# Altium PCB PCB1 V1.PcbDoc (part 2 of 2)
Units mil, origin at the board's own origin, x right, y up, seen from the top; angles counter-clockwise.
Board outline 4993 x 2044 mil, 4 copper layers (Top Layer, GND, VDD, Bottom Layer), stack 62.449 mil thick; 133 components, 91 nets, 461 pads, 189 vias.
Unrouted connection lines stored in the file: 19.
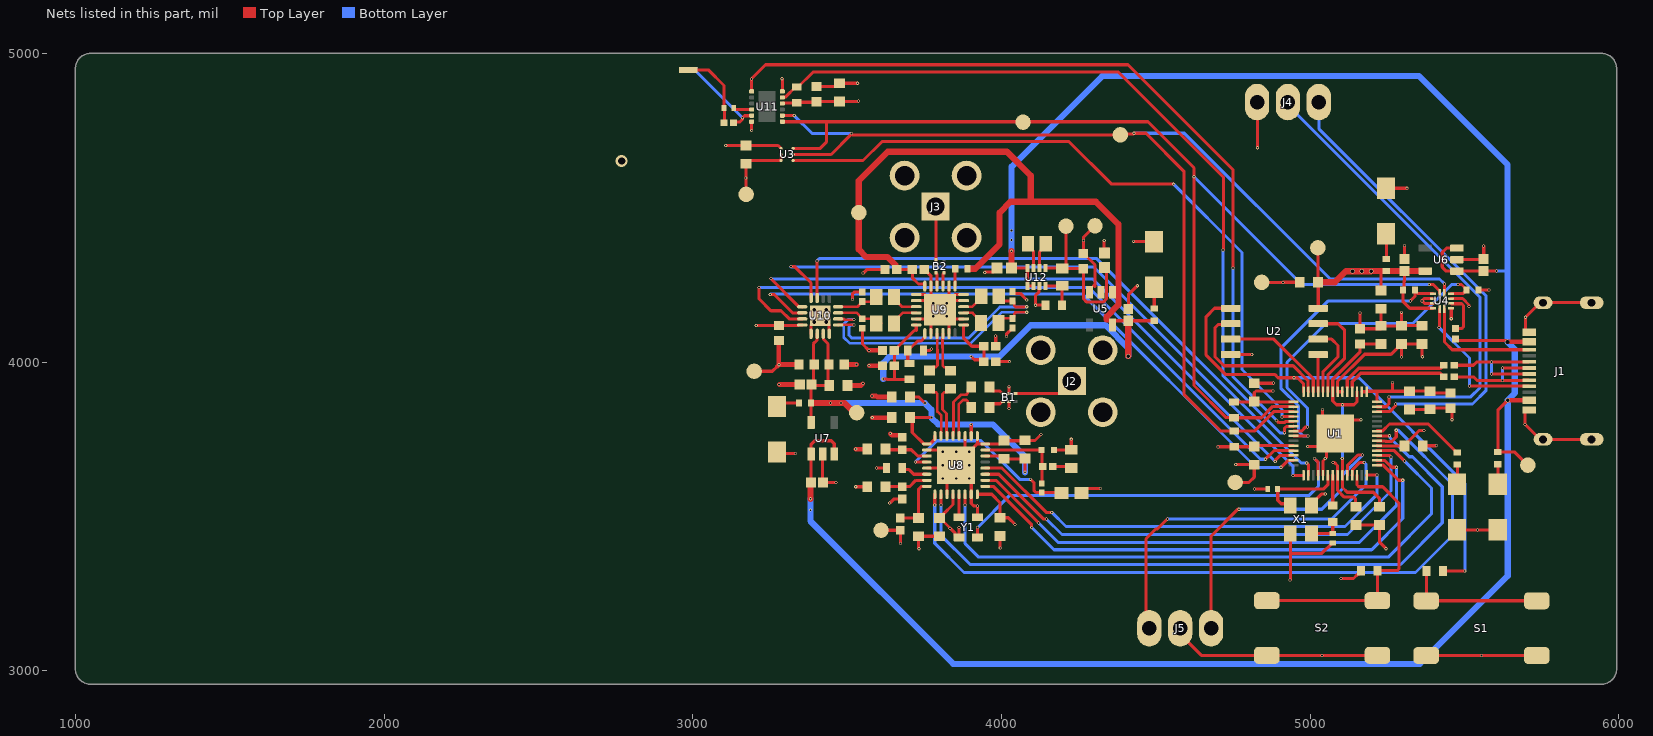
[diagram p4: the nets of this part, all layers, seen from the top]

## Via types
v1: diameter 10, hole 6, Top Layer to Bottom Layer, 164 vias
v2: diameter 19.68, hole 7.87, Top Layer to Bottom Layer, 13 vias
v3: diameter 15, hole 12, Top Layer to Bottom Layer, 6 vias
v4: diameter 19.68, hole 11.81, Top Layer to Bottom Layer, 5 vias
v5: diameter 39.37, hole 23.62, Top Layer to Bottom Layer, 1 vias

## Nets (pads, with @x,y where several pads share a name; then routed paths per layer and width w, separated by ;. In a path a pad name is that pad's centre, name@x,y a point inside that pad or via, vN(x,y) a via of type N, cw(c..) or ccw(c..) an arc to the next point about the centre after c; other vN are vias at no path point)
+3V3: C1.1 C2.1 C3.1 C4.1 C5.1 C6.1 C7.1 C8.1 C9.1 C13.1 C21.1 C28.1 C29.1 C44.1 C46.1 C53.1 C61.1 C62.1 R8.2 R9.2 R10.2 R11.2 R13.2 R17.2 R21.2 TP7.1 U1.1 U1.10 U1.22 U1.33 U1.42 U1.43 U1.44 U1.48 U1.49 U2.8 U3.A1 U4.12 U6.5 U8.28 U8.32 U10.16 U11.10 U11.12 Y1.4 | length 3728.3
  Top Layer w10: v1(3107,4701) 3107.16,4701.16 C61.1@3172,4701.16 3276.75,4701.16 3285.9,4692 U3.A1@3286,4692 ; v1@3205,4118 v1(3205.68,4118.68) C53.1@3279,4118.68 3342.1,4118.68 3343.36,4119.94 U10.16@3354.86,4119.94 ; v1(3289,4917.58) 3290.21,4916.36 U11.12@3290.21,4876.74 ; U11.10@3290.21,4837.37 3291.59,4837.37 3293.63,4839.41 R21.2@3337,4839.41 3338.95,4841.36 3399.05,4841.36 C44.1@3401,4843.32 3475.32,4843.32 C46.1@3476,4844 3536,4844 v1(3537,4845) ; C28.1@3799,3494.53 3808,3485.53 3808,3485 3810.5,3485 3850.23,3445.27 3850.23,3439.83 3858.02,3432.04 Y1.4@3862.94,3432.04 3862.94,3463.94 v1(3863,3464) ; C28.1@3800.97,3494.53 3811.72,3505.28 3811.72,3507.24 3843.16,3538.69 U8.28@3843.16,3571.51 ; U8.32@3921.9,3571.51 3968.49,3571.51 3995,3545 C29.1@3995,3495.53 4022.47,3495.53 v1(4044,3474) ; v1(4701,3725) 4701.41,3725.41 R8.2@4754,3725.41 4817.72,3725.41 C3.1@4818.95,3726.64 4821.28,3728.97 U1.10@4945.72,3728.97 ; R9.2@4753,3870.59 4817.43,3870.59 C2.1@4818.95,3872.11 ; R8.2@4756,3726 R8.2@4756.64,3726.64 ; C2.1@4835.11,3870.7 U1.1@4945.72,3870.7 ; C2.1@4835.11,3872.11 C2.1@4818.95,3872.11 ; v1(4880,3906) 4824.81,3906 4818.95,3900.14 C2.1@4818.95,3872.11 ; TP7.1@5012,4382 TP7.1@5024,4370 ; C13.1@5025,4258.43 C13.1@5025.13,4258.3 5026.11,4257.31 U2.8@5026.11,4174.05 ; C13.1@5025,4266.02 TP7.1@5025,4370 ; v1(5074,3674) 5079.46,3674 5088.83,3664.64 5088.83,3584.17 5110.79,3562.21 5140.79,3562.21 5147.17,3555.83 5147.17,3532.91 C4.1@5149.14,3530.94 ; v1(5100,3299) 5140.36,3299 5154.37,3313.01 5157.39,3313.01 5165.36,3320.98 R10.2@5165.36,3324 ; U1.48@5104.57,3903.57 U1.49@5088.83,3903.57 5088.83,3937.49 5176.45,4025.11 5262.48,4025.11 5283.24,4045.87 5283.24,4047.83 5293.98,4058.58 C7.1@5295.95,4058.58 ; U1.44@5167.57,3903.57 U1.43@5183.31,3903.57 5183.31,3904.28 5184.38,3905.35 5214.95,3905.35 5216.19,3904.11 ; U1.33@5216.19,3728.97 5217.16,3728 C5.1@5305.47,3728 5305.47,3729.97 5353.5,3778 v1(5369,3778) ; U1.42@5216.19,3870.7 5216.19,3904.11 ; C62.1@5216.24,4242.39 5226.98,4231.64 C62.1@5228.95,4231.64 ; 5222.48,4294.43 5228.95,4287.95 C62.1@5228.95,4231.64 ; C62.1@5230.43,4233.11 C62.1@5228.95,4231.64 ; v1(5267,3934) 5267,3907.72 5269.38,3905.35 ; v1(5296,4016) v1(5296,4016) C7.1@5295.95,4058.58 ; C21.1@5305.95,4294.86 5305.95,4262.16 5303.71,4259.92 5303.71,4236.56 R11.2@5300.27,4233.11 5300.27,4196.73 5322.92,4174.08 U4.12@5397.55,4174.08 ; C6.1@5320.54,3906.13 C6.1@5321.04,3905.64 ; v1(5364,4017) 5362.95,4018.05 C8.1@5362.95,4058.58 C7.1@5295.95,4058.58 ; C9.1@5454.95,3899.8 5393.8,3899.8 C1.1@5387.95,3905.64 C6.1@5321.04,3905.64 ; R13.2@5545.32,4233.11 v1(5578.89,4233.11) v1@5579,4233 ; 5216.19,3904.11 5217.43,3905.35 5269.38,3905.35 ; 5269.38,3905.35 C6.1@5321.33,3905.35 C6.1@5321.04,3905.64
  Top Layer w20: C13.1@5025,4258.43 C13.1@5025,4260.14 ; C13.1@5025.13,4258.3 5080.3,4258.3 5116,4294 v3(5137,4294) 5197.57,4294 v3(5198,4294.43) 5222.48,4294.43 R17.2@5246.95,4294.43 5248.61,4294.43 5249.04,4294.86 C21.1@5305.95,4294.86 ; C21.1@5305.68,4294.58 5372.68,4294.58 U6.5@5372.95,4294.31
  other v1: 3833.13,3460.94
  other v3: 5167,4294.43
+3V3A: C23.1 C30.1 C31.1 C32.1 C33.1 C51.1 C52.1 C54.1 R16.2 TP8.1 U7.5 U8.6 U8.10 U8.16 U8.17 U10.2 U10.3 | length 1945.1
  Top Layer w10: C23.1@3383.39,3924 R16.2@3383.39,3867.3 3383.49,3867.19 3383.49,3804.29 U7.5@3383.6,3804.18 ; C54.1@3390.68,3992 3390.68,3932.43 C23.1@3385.25,3927 3388.25,3924 C52.1@3441.94,3924 3438.32,3927.63 C51.1@3438.32,3992 ; C54.1@3393.68,3992 3390.68,3995 3390.68,4058.99 3402.89,4071.19 3402.89,4091.21 U10.2@3403.09,4091.4 ; U10.3@3422.77,4091.4 3422.97,4091.21 3422.97,4074.33 3438.32,4058.99 3438.32,3995 C51.1@3441.32,3992 ; C31.1@3703.53,3886.59 3732.41,3886.59 v1(3752,3867) ; v1(3773,3820) 3772.59,3819.59 C32.1@3703.53,3819.59 3711,3812.12 3711,3771.74 3747.84,3734.9 U8.17@3758.51,3734.9 3769.18,3734.9 3784.1,3749.82 U8.16@3784.1,3760.49 ; v1(3902,3798) 3902.21,3797.79 U8.10@3902.21,3760.49 ; U8.6@3947.49,3695.53 3994.42,3695.53 4004,3685.94 C30.1@4003.58,3685.53 ; C30.1@4004.53,3686.47 C33.1@4071,3686.47 ; v1(4076,3643) C33.1@4076,3687.47
  Top Layer w20: R16.2@3383.39,3867.3 v1(3446.57,3867.3) v1(3480.7,3867.3) 3491.58,3867.3 3522.88,3836 TP8.1@3531,3836
  Bottom Layer w20: v1@3448.87,3867 v1(3752,3867) 3773,3846 v1(3773,3820) 3795,3798 v1(3902,3798) 3972,3798 4076,3694 v1(4076,3643)
+5: C17.1 C55.2 C56.2 C57.2 C58.2 C59.2 C60.2 R15.2 R22.2 R23.2 TP6.1 U5.5 U9.6 U9.13 U9.24 | length 3968.7
  Top Layer w10: v1(3617,3945) 3628.86,3945 ; 3628.86,3944 3653,3944 ; C60.2@3661,4300 C59.2@3711.42,4300 3711.42,4272.58 3731.55,4252.45 3751.55,4252.45 3751.63,4252.37 U9.24@3751.63,4246 ; R23.2@3702,3944 3653,3944 ; U9.6@3715,4119.94 3715.08,4120.02 U9.6@3724.07,4120.02 3724.07,4102.28 ; 3718.07,4101.87 3653.79,4037.59 C55.2@3653,4037.59 C56.2@3653,3987.59 3653,3944 ; U9.13@3890.29,4119.94 3890.21,4120.02 U9.13@3877.61,4120.02 3877.61,4077.39 3904,4051 C57.2@3943,4051 3942.85,4050.85 3942.85,4001.15 C58.2@3942.71,4001 3936.46,4007.25 3912.75,4007.25 v1(3902,4018) ; 4340.4,4137.85 4344.5,4133.75 C17.1@4411,4133.75 4411.12,4133.63 R15.2@4495,4133.63
  Top Layer w20: C60.2@3661,4300 3660.21,4300 3656.04,4304.17 3656.04,4315.31 3631.34,4340.01 3562.7,4340.01 3538,4364.72 TP6.1@3538,4484 3538,4587 3632,4681 4018,4681 4095,4604 4095,4519 ; R22.2@3889.68,4302 3915,4302 3994,4381 3994,4484 4029,4519 4095,4519 ; 4340.4,4137.85 4340.4,4146.71 4379,4185.31 4379,4446 4306,4519 4095,4519 ; v3(4411,4019) C17.1@4411,4133.75
  Bottom Layer w20: v1(3617,3945) 3617,3996.28 3638.72,4018 v1(3902,4018) 3994,4018 4095,4119 4337.13,4119 4411,4045.13 v3(4411,4019)
cpout: C34.1 C35.1 R18.1 U8.7 | length 304.3
  Top Layer w10: U8.7@3958.16,3715.21 U8.7@3947.49,3715.21 3947.57,3715.13 4130.18,3715.13 C35.1@4130.31,3715 4131.72,3713.59 4131.72,3662.41 C34.1@4133.13,3661 4131.56,3659.44 4131.56,3608.33 R18.1@4130,3606.76
flash_cs: R7.1 U1.56 U2.1 | length 1644.8
  Top Layer w10: U2.1@4742.25,4174.05 4689.89,4174.05 4662.95,4147.11 4662.95,4022.05 4724.89,3960.11 4884.89,3960.11 4896,3949 4959.06,3949 4978.59,3929.47 U1.56@4978.59,3903.57 ; R7.1@5429.64,3323 v1(5501,3323)
  Bottom Layer w10: v1(4948,3949) 5158,3949 5501,3606 v1(5501,3323)
GND: B1.2 B1.5 C1.2 C2.2 C3.2 C4.2 C5.2 C6.2 C7.2 C8.2 C9.2 C10.2 C11.2 C12.2 C13.2 C14.2 C15.2 C16.2 C17.2 C18.2 C19.2 C20.2 C21.2 C22.2 C23.2 C28.2 C29.2 C30.2 C31.2 C32.2 C33.2 C35.2 C36.2 C37.2 C38.1 C39.2 C40.1 C41.2 C42.1 C44.2 C46.2 C47.1 C48.1 C49.1 C50.1 C51.2 C52.2 C53.2 C54.2 C55.1 C56.1 C57.1 C58.1 C59.1 C60.1 C61.2 C62.2 D1.1 D2.1 D3.1 D4.1 D5.1 J1.A1_B12 J1.B1_A12 J1.SH1 J1.SH2 J1.SH3 J1.SH4 J2.2 J2.3 J2.4 J2.5 J3.2 J3.3 J3.4 J3.5 J4.1 J5.2 R2.2 R19.1 R20.1 R24.1 S1.1 S1.2 S2.1 S2.2 TP2.1 TP9.1 TP10.1 TP11.1 TP12.1 TP13.1 U1.19 U1.57 U2.4 U3.B1 U3.C1 U4.3 U4.5 U4.10 U4.11 U5.2 U6.2 U7.2 U8.8 U8.9 U8.11 U8.18 U8.21 U8.27 U8.31 U8.33 U9.1 U9.2 U9.5 U9.8 U9.11 U9.14 U9.17 U9.18 U9.20 U9.23 U9.25 U10.1 U10.4 U10.17 U11.6 U12.7 X1.2 X1.4 Y1.2 | length 8607.7
  Top Layer w10: v1@3172,4595 C61.2@3172,4642.1 3182.53,4652.63 U3.C1@3286,4652.63 U3.B1@3286,4672.31 ; v1(3172,4596) 3173,4595 TP12.1@3173,4543 ; v1(3191,4750) U11.6@3191,4778.31 ; TP9.1@3199,3970 3258,3970 3274.5,3986.5 ; D4.1@3273,3708.18 3277.18,3704 v1(3333,3704) ; U10.1@3383.4,4091.4 3383.6,4091.6 3383.6,4120.14 v4(3393.24,4129.79) ; C44.2@3401,4892.68 3465.63,4892.68 C46.2@3476,4903.06 3533.94,4903.06 v1@3535,4902 ; U7.2@3421,3701.82 3421,3611 C22.2@3422,3610 v1@3464,3610 ; v4(3432.61,4129.79) 3441.39,4121.01 3441.39,4103.96 3442.46,4102.9 U10.4@3442.46,4080.46 ; v1(3517,4202) 3517,4220.5 3522.86,4226.35 C47.1@3549,4226.35 ; v1(3528,3596) C41.2@3565.47,3596 ; C48.1@3550,4109.65 3550,4058.18 v1(3570.59,4037.59) ; v1(3552,4288) 3563.35,4299.35 C60.1@3612,4299.35 ; v1(3595,3657) R19.1@3627.41,3657 ; TP10.1@3610,3455 TP10.1@3610,3455 3671.96,3454.96 C40.1@3672,3454.92 3673,3453.92 v1(3673,3412) ; v1(3638,3543) 3650.92,3555.92 C42.1@3679,3555.92 ; U9.5@3724.07,4139.7 3771.32,4139.7 U9.8@3771.32,4092.46 ; U9.2@3724.07,4198.76 U9.25@3771.32,4198.76 ; U9.1@3724.07,4218.44 U9.1@3724.07,4218.44 3751.71,4218.36 U9.25@3771.32,4198.76 ; v1(3733,3395) 3732,3396 C39.2@3732,3435.94 3732.47,3435.47 C28.2@3799,3435.47 ; R24.1@3747.59,4037.59 3768.59,4037.59 v1(3773,4042) ; C59.1@3750,4300 3750.79,4300 3771.32,4279.47 U9.23@3771.32,4246 U9.25@3771.32,4198.76 ; U8.21@3758.51,3656.16 3799.85,3656.16 v2(3809.69,3666) ; U8.18@3758.51,3715.21 3803.79,3715.21 v2(3809.69,3709.31) ; U9.25@3800.84,4169.23 3849.98,4218.36 3877.54,4218.36 U9.18@3877.61,4218.44 ; U8.27@3823.47,3571.51 3823.47,3636.47 v2(3853,3666) 3882.53,3695.53 U8.11@3882.53,3760.49 ; U9.11@3830.37,4092.46 3830.37,4139.7 U9.14@3877.61,4139.7 ; U9.20@3830.37,4246 3830.37,4198.76 U9.17@3877.61,4198.76 ; v2(3896.31,3622.69) 3902.21,3616.79 U8.31@3902.21,3571.51 3902.21,3541.79 3910,3534 v1(3923,3534) 3922,3533 Y1.2@3922,3497 ; v2(3896.31,3709.31) 3921.9,3734.9 ; U8.9@3921.9,3760.49 3921.9,3734.9 ; v1(3946,4290) 3947.16,4291.16 3972.54,4291.16 C16.2@3985.36,4304 ; v1(3981,4084) 3981.58,4083.42 C57.1@3981.58,4051 ; C58.1@3981.29,4001 v1(4026,4001) ; C29.2@3995,3436.47 3995,3400 v1@3997,3398 ; v1(4016,4083) 4016,4089.86 4036,4109.86 C50.1@4036,4110.65 ; B1.5@4024.68,3872.41 v1(4024.68,3849.32) v1@4025,3849 ; B1.2@4024.68,3898 v1(4024.68,3919.68) v1@4025,3920 ; C49.1@4036,4228.35 4036,4227.57 4041.24,4222.33 4060.67,4222.33 v1@4079,4204 ; v1(4110.88,4183.83) 4110.88,4215.34 4110.14,4216.08 4122.07,4228.01 4122.07,4244.83 U12.7@4123.37,4246.13 ; v1@4111.09,4183.41 4111.68,4184 R2.2@4143.36,4184 ; v1(4128,3765) 4108.53,3745.53 4071,3745.53 4070.47,3745 4004,3745 3993.9,3734.9 U8.8@3947.49,3734.9 3921.9,3734.9 ; C35.2@4169.69,3715 4224.94,3715 R20.1@4226,3716.06 v1(4226,3750) ; C36.2@4259.55,3576 4273.55,3590 v1@4320,3590 ; C19.2@4265,4351.68 4266,4352.68 v1@4266,4392 ; v1(4266,4394) 4266,4404 TP11.1@4303,4441 ; C19.2@4266.06,4351.68 4303,4314.75 4303,4244.15 4299.16,4247.99 ; v1@4332.15,4391.14 4332.15,4365.46 4346.82,4365.46 C18.2@4334,4352.64 ; C17.2@4411,4172.25 4411,4218 v1(4440.12,4247.12) ; v1(4428,4391) 4429.18,4389.82 D3.1@4494,4389.82 ; J5.2@4579,3138 4579,3118.32 4647.48,3049.83 S2.2@4859.73,3049.83 v1(5038.87,3049.83) S2.1@5218,3049.83 ; U2.4@4742.25,4024.05 v1(4811,4024) v1(4811,4024) ; TP2.1@4757,3610 4802,3610 4818.95,3626.95 C3.2@4818.95,3667.58 4759.42,3667.58 v1(4759,3668) ; C2.2@4818.95,3931.17 4880.17,3931.17 v1(4881,3932) ; v1(4820,3589) 4820.11,3589.11 C14.2@4862.46,3589.11 ; J4.1@4828,4842 4830,4840 v1(4830,4694) ; TP13.1@4843,4258 v1(4912,4258) 4912.3,4258.3 C13.2@4966.07,4258.3 ; v1(4935,3294) 4935.87,3294.87 4935.87,3380 ; X1.2@4935.87,3444.87 4935.87,3380 ; v1(4992,3726) 5038.61,3726 U1.57@5057.61,3744.99 ; X1.4@5004.77,3535.43 5004.77,3540.35 5036.43,3572 v1(5049,3572) ; v1(5040,3846) 5040,3809.29 U1.57@5080.95,3768.34 ; U1.19@5041.58,3633.1 5041.58,3679.58 5052.92,3690.92 5052.92,3740.31 U1.57@5057.61,3744.99 ; C15.2@5073.28,3413.42 5071.31,3413.42 5037.89,3380 4935.87,3380 ; C4.2@5149.14,3471.88 C11.2@5224.93,3471.88 5224.93,3416.07 v1(5246,3395) ; v1@5160.56,3812.74 5125.36,3812.74 U1.57@5080.95,3768.34 ; v1(5161,4159) 5161.95,4158.05 C10.2@5161.95,4107.8 5229.63,4107.8 5239,4117.17 5295.48,4117.17 C7.2@5295.95,4117.64 ; C12.2@5228.95,4117.17 C62.2@5228.95,4172.58 ; D5.1@5246,4562.82 5313.82,4562.82 v1(5314,4563) ; v1(5296,4161) v1(5296,4161) C7.2@5295.95,4117.64 ; C21.2@5305.95,4333.36 v1(5306,4377) v1(5306,4377) ; C6.2@5321.33,3846.29 5387.66,3846.29 C1.2@5387.95,3846.58 5391.8,3850.43 C9.2@5454.95,3850.43 5459,3846.38 v1(5459,3813) ; C8.2@5362.95,4117.64 C7.2@5295.95,4117.64 ; C5.2@5363.71,3728.77 5407.77,3728.77 v1(5409,3730) ; S1.2@5375.87,3049.42 S1.1@5734.13,3049.42 ; U4.10@5397.55,4205.57 5369.57,4205.57 v1(5362,4198) 5370.17,4189.83 U4.11@5397.55,4189.83 U4.11@5401.33,4189.83 ; U4.3@5456.61,4174.08 5457,4173.69 v1(5457,4140) ; U4.5@5456.61,4205.57 5493.9,4205.57 5514.62,4184.86 v1(5514.62,4180) ; U6.2@5475.31,4331.71 5563,4331.71 5562.19,4332.52 5562.19,4375.81 v1(5562,4376) ; D1.1@5475.95,3456.29 D2.1@5607.95,3456.29 ; J1.A1_B12@5709.2,3844.87 5702.81,3844.87 5696,3838.06 v1(5696,3798) 5696.22,3798 5744.63,3749.59 J1.SH3@5911.95,3749.59 ; J1.B1_A12@5709.2,4096.83 5703.81,4096.83 5697,4103.65 v1(5697,4145) 5697.52,4145 5744.63,4192.11 J1.SH4@5911.95,4192.11 ; U1.57@5057.61,3744.99 U1.57@5080.95,3768.34
  Top Layer w15: 3274.5,3986.5 v1(3279,3991) ; C53.2@3279,4069.32 v1(3279,3991) ; v1(3280,3927) C23.2@3346.75,3927 ; C54.2@3341.32,3992 3280,3992 v1(3279,3991) ; C51.2@3487.68,3992 v1(3531,3992) ; C52.2@3501,3924 3545,3924 v1(3551,3930) ; v1@3528,3718 C37.2@3565.47,3718 ; v1(3570.59,4037.59) C55.1@3614.42,4037.59 ; v1@3572,3988 3572.41,3987.59 C56.1@3614.42,3987.59 ; v1@3581,3819 v1(3581.59,3819.59) C32.2@3644.47,3819.59 ; v1(3581,3889.84) 3594.46,3889.84 3597.71,3886.59 C31.2@3644.47,3886.59 ; v1@3640,3768 3645.25,3762.75 3672.33,3762.75 C38.1@3679,3756.08
  other v1: 5555,3049.42 3996,3398 5541.95,3456.29 4321,3590 3464.09,3609.94 5049,3687 3528.22,3718.33 3640.01,3768.33 5165,3813 3571.39,3988.07 4082,4201 4333,4394 3534,4903
  other v2: 3809.69,3622.69 3853,3622.69 3896.31,3666 3853,3709.31 3779.19,4147.57 3822.5,4147.57 3779.19,4190.88 3822.5,4190.88
  other v4: 3412.93,4149.47 3393.24,4169.16 3432.61,4169.16
I_N: C48.2 L4.2 U10.7 | length 160.2
  Top Layer w8.8: U10.7@3471,4159.31 3471.43,4159.74 3530.4,4159.74 3549,4141.14 C48.2@3549,4140.35 3579.06,4140.35 L4.2@3594.41,4125 ; L4.2@3595.06,4141.35 L4.2@3610.41,4126
I_O_N: L4.1 U9.4 | length 96.3
  Top Layer w8.8: L4.1@3651.59,4125 3651.59,4130.95 3680.02,4159.39 3723.67,4159.39 3723.87,4159.19 U9.4@3724.07,4159.39 ; L4.1@3667.59,4126 L4.1@3667.59,4131.95
I_O_P: L2.1 U9.3 | length 95.4
  Top Layer w8.8: L2.1@3651.59,4211 3651.59,4205.05 3677.57,4179.07 U9.3@3724.07,4179.07 U9.3@3723.87,4179.27 ; L2.1@3667.59,4206.05 L2.1@3667.59,4212
I_P: C47.2 L2.2 U10.8 | length 153.8
  Top Layer w8.8: U10.8@3471.16,4178.84 U10.8@3471,4179 3533.14,4179 3549,4194.86 C47.2@3549,4195.65 3594.06,4195.65 L2.2@3610.41,4212
IQ_EN_N: R23.1 R24.2 U9.7 | length 113.5
  Top Layer w10: R24.2@3696.41,4041.53 R24.2@3696.41,4037.59 3696.41,4000.77 R23.1@3702,3995.18 ; R24.2@3702.41,4041.94 3728.47,4068 3739.81,4068 U9.7@3751.55,4079.74
NetANT*1_1: ANT*1.1 C43.2 C45.2 | length 246
  Top Layer w10: ANT*1.1@2986.25,4946.41 3050.59,4946.41 3101.25,4895.75 C43.2@3101.25,4823 3102.45,4821.8 3102.45,4786.2
  other v5: 2769.72,4651.13
NetANT*1_2: ANT*1.2 C45.1 U11.5 | length 310.2
  Top Layer w10: C45.1@3132.35,4775 3134.77,4777.41 3152.41,4777.41 3161,4786 v1(3161,4791) 3167.73,4797.73 3190.73,4797.73 U11.5@3191,4798
  Bottom Layer w10: ANT*1.2@2986.25,4946.41 3005.59,4946.41 v1(3161,4791)
NetB1_1: B1.1 J2.1 | length 200.2
  Top Layer w10: B1.1@4044.37,3898 4188,3898 J2.1@4228,3938
NetB1_3: B1.3 C25.2 | length 53.3
  Top Layer w10: C25.2@3961.53,3919 3961.53,3917.03 3972.28,3906.28 3994.91,3906.28 4003.19,3898 B1.3@4005,3898
NetB1_4: B1.4 C24.2 | length 53.1
  Top Layer w10: C24.2@3961.53,3852 3961.53,3853.97 3972.28,3864.72 3995.5,3864.72 4003.19,3872.41 B1.4@4005,3872.41
NetB2_1: B2.1 J3.1 | length 174.4
  Top Layer w10: J3.1@3786.61,4503.39 3788.2,4501.8 B2.1@3788.2,4329.69
NetC10_1: C10.1 C11.1 C12.1 U1.23 U1.45 U1.50 | length 839.3
  Top Layer w10: v1(5104,3688) 5104.57,3687.43 5104.57,3593.43 5120,3578 5204.44,3578 5224.93,3557.51 C11.1@5224.93,3530.94 ; U1.45@5151.82,3903.57 5151.82,3871.21 5142.25,3861.65 5085.17,3861.65 5073.08,3873.73 U1.50@5073.08,3903.57 5073.08,3944.24 5161.95,4033.11 C10.1@5161.95,4058.43 5228.64,4058.43 C12.1@5228.95,4058.11
  Bottom Layer w10: v1(5104,3688) 5104.85,3688.85 v1(5104.85,3861.65)
NetC14_1: C14.1 U1.20 X1.1 | length 283.3
  Top Layer w10: X1.1@4935.87,3535.43 4930.36,3540.94 4906.06,3540.94 4895,3552 4895,3589.11 5043.93,3589.11 5057.33,3602.51 U1.20@5057.33,3633.1
NetC15_1: C15.1 R3.1 X1.3 | length 107.6
  Top Layer w10: X1.3@5005.79,3445.9 X1.3@5004.77,3444.87 X1.3@5004.77,3444.87 C15.1@5073.28,3444.91 R3.1@5073.28,3482.52
NetC18_1: C18.1 C19.1 R1.2 TP5.1 U5.1 U5.3 U12.1 | length 550.3
  Top Layer w10: U12.1@4143.06,4304 4195.56,4304 R1.2@4197,4302.56 ; TP5.1@4209,4440 4209,4313.31 4198.25,4302.56 R1.2@4197,4302.56 ; C18.1@4334,4305.36 4340.4,4298.95 4340.4,4244.15 4340.4,4204.4 4331,4195 4275,4195 4265.6,4204.4 4265.6,4244.15 4265.6,4301.72 C19.1@4265,4302.32 4197.24,4302.32 R1.2@4197,4302.56 ; C18.1@4338,4300.68 C18.1@4338.14,4300.54
NetC34_2: C34.2 R20.2 | length 60.8
  Top Layer w10: C34.2@4166.87,3661 4222,3661 R20.2@4226,3657
NetC43_1: C43.1 U11.4 | length 61.6
  Top Layer w10: C43.1@3132.75,4823 3132.75,4821.03 3136.09,4817.69 U11.4@3191,4817.69
NetD1_2: D1.2 R6.1 | length 63.9
  Top Layer w10: D1.2@5475.95,3603.93 5476.95,3604.93 R6.1@5476.95,3667.43
NetD2_2: D2.2 R12.1 | length 64.8
  Top Layer w10: D2.2@5607.95,3603.93 R12.1@5607.95,3668.74
NetD3_2: D3.2 R15.1 | length 69.6
  Top Layer w10: D3.2@4494,4242.18 4495,4241.18 R15.1@4495,4173
NetD4_2: D4.2 R16.1 | length 75.8
  Top Layer w10: D4.2@3273,3855.82 3284.48,3867.3 R16.1@3344.02,3867.3
NetD5_2: D5.2 R17.1 | length 81.8
  Top Layer w10: D5.2@5246,4415.18 5246.95,4414.23 R17.1@5246.95,4333.8
NetJ1_A5: J1.A5 U4.1 | length 485.4
  Top Layer w10: v1(5416.95,4112.11) 5419.2,4114.36 U4.1@5419.2,4172.11 ; v1(5515.95,3922.11) 5516.43,3921.64 J1.A5@5709.2,3921.64
  Bottom Layer w10: v1(5416.95,4112.11) 5515.95,4013.11 v1(5515.95,3922.11)
NetJ1_A6: J1.A6 J1.B6 R5.2 | length 404.2
  Top Layer w10: R5.2@5466.41,3989.43 5528.42,3989.43 5539.24,4000.26 v1(5587.84,4000.26) 5587.9,4000.32 5707.14,4000.32 J1.B6@5707.2,4000.38 ; v1(5587.84,3960.83) 5588.02,3961.01 J1.A6@5707.2,3961.01
  Bottom Layer w10: v1(5587.84,3960.83) v1(5587.84,4000.26)
NetJ1_A7: J1.A7 J1.B7 R4.2 | length 371
  Top Layer w10: R4.2@5466.41,3952.03 5529.4,3952.03 5541.21,3940.22 v1(5622.79,3940.22) 5622.91,3940.22 5690.35,3940.22 5691.45,3941.32 J1.B7@5707.2,3941.32 ; v1(5622.79,3980.69) J1.A7@5707.2,3980.69
  Bottom Layer w10: v1(5622.79,3940.22) v1(5622.79,3980.69)
NetJ1_B5: J1.B5 U4.2 | length 391.8
  Top Layer w10: U4.2@5434.95,4172.11 5434.95,4065.05 5460.25,4039.75 J1.B5@5709.2,4039.75
NetJ4_2: J4.2 U1.41 | length 1556.5
  Top Layer w10: U1.41@5216.19,3854.95 5246.08,3854.95 5255,3863.87 v1(5255,3887)
  Bottom Layer w10: J4.2@4928,4842 4928,4832 5550,4210 5550,3917 5519,3886 5256,3886 v1(5255,3887)
NetJ4_3: J4.3 U1.40 | length 1544.6
  Top Layer w10: U1.40@5216.19,3839.2 5257.67,3839.2 5276,3857.53 v1(5276,3864)
  Bottom Layer w10: J4.3@5028,4842 5028,4756 5570,4214 5570,3908 5526,3864 v1(5276,3864)
NetL1_1: L1.1 U12.3 | length 86.2
  Top Layer w10: L1.1@4086.41,4383 4086.41,4377.05 4103.69,4359.78 U12.3@4103.69,4304
NetL1_2: L1.2 U12.2 | length 87.4
  Top Layer w10: U12.2@4123.37,4304 4123.37,4356.84 4143.59,4377.05 L1.2@4143.59,4383
NetR1_1: R1.1 R2.1 U12.8 | length 115.2
  Top Layer w10: U12.8@4143.06,4246.13 4195.69,4246.13 4196.64,4245.17 R2.1@4196.64,4184
NetR3_2: R3.2 U1.21 | length 97.4
  Top Layer w10: U1.21@5073.08,3633.1 5073.08,3536 R3.2@5073.28,3535.81
NetR6_2: R6.2 U1.36 | length 308.4
  Top Layer w10: U1.36@5216.19,3776.21 5217.25,3777.28 5235.28,3777.28 5257,3799 5382.78,3799 5474.98,3706.8 R6.2@5476.95,3706.8
NetR7_2: R7.2 S1.3 S1.4 | length 454.9
  Top Layer w10: R7.2@5376.36,3323 5376.36,3227.07 S1.4@5375.87,3226.58 S1.3@5734.13,3226.58
NetR11_1: R11.1 U1.8 U4.9 | length 963.7
  Top Layer w10: U1.8@4945.72,3760.46 4992.54,3760.46 v1(4993,3760) ; v1(5325,4198) 5339,4212 5339,4232.47 R11.1@5339.64,4233.11 ; R11.1@5339.64,4231.14 5349.46,4221.32 5361,4221.32 U4.9@5397.55,4221.32
  Bottom Layer w10: v1(4993,3760) 4978,3760 4962,3776 4962,3858 4905,3915 4905,4044.14 5058.86,4198 v1(5325,4198)
NetR13_1: R13.1 U1.7 U4.6 | length 1036.6
  Top Layer w10: U1.7@4945.72,3776.21 4971.79,3776.21 4985.57,3790 v1(4991,3790) ; U4.6@5456.61,4221.32 5494.17,4221.32 5499.14,4226.3 5501.11,4226.3 5505.95,4231.14 R13.1@5505.95,4233.11 5505.95,4235.08 5490.03,4251 v1(5479,4251)
  Bottom Layer w10: v1(4991,3790) 4991,3851 4925,3917 4925,3999 5051,4125 5332.23,4125 5458.23,4251 v1(5479,4251)
NetR14_2: R14.2 U4.4 | length 138.7
  Top Layer w10: U4.4@5457.67,4188.76 5490.92,4188.76 5496.77,4182.91 5496.77,4114.07 5490.92,4108.21 R14.2@5470.87,4108.21
NetR21_1: R21.1 U1.6 U11.11 | length 2569.3
  Top Layer w10: U11.11@3290.21,4857.06 3292.1,4858.94 3301.42,4858.94 3333.06,4890.59 R21.1@3337,4890.59 3340.94,4890.59 3389.35,4939 4379.23,4939 4719,4599.23 4719,4364.17 v1(4717.83,4363) ; v1(4916.59,3770.64) 4916.59,3784.59 4922.9,3790.9 4944.65,3790.9 U1.6@4945.72,3791.96
  Bottom Layer w10: v1(4717.83,4363) 4717.83,3955.17 4902.36,3770.64 v1(4916.59,3770.64)
NetR22_1: R22.1 U9.19 | length 56.4
  Top Layer w10: U9.19@3850.06,4246 3850.13,4246.08 3850.13,4301.82 R22.1@3850.32,4302 ; R22.1@3850.13,4304.82 R22.1@3850.32,4305
NetU1_5: U1.5 U11.1 | length 2690.5
  Top Layer w10: U11.1@3191,4876.74 3191,4916 v1(3190,4917) 3236,4963 4410,4963 4750,4623 v1(4750,4305) ; v1(4891,3811) 4898.48,3803.52 4916.39,3803.52 4919.52,3806.65 4944.65,3806.65 U1.5@4945.72,3807.71
  Bottom Layer w10: v1(4750,4305) 4750,3952 v1(4891,3811)
NetU1_11: U1.11 U10.15 | length 2176.7
  Top Layer w10: v1(3215,4241) 3215,4204 3253,4166 3285.9,4166 3312.27,4139.63 U10.15@3354.86,4139.63 ; v1(4854.88,3684.88) 4883.22,3713.22 U1.11@4945.72,3713.22
  Bottom Layer w10: v1(3215,4241) 3215.5,4241.5 4282.5,4241.5 4839.12,3684.88 v1(4854.88,3684.88)
NetU1_12: U1.12 U10.13 | length 2086.4
  Top Layer w10: v1(3254,4270) 3254,4268.64 3343.3,4179.33 3354.52,4179.33 U10.13@3354.86,4179 ; v1(4887,3678) 4887,3681.59 4902.88,3697.47 U1.12@4945.72,3697.47
  Bottom Layer w10: v1(3254,4270) 3255,4269 4296,4269 v1(4887,3678)
NetU1_13: U1.13 U10.14 | length 2066
  Top Layer w10: v1(3251,4219) 3263.48,4219 3323.16,4159.31 U10.14@3354.86,4159.31 ; v1(4906,3659) 4927.66,3680.66 4944.65,3680.66 U1.13@4945.72,3681.72
  Bottom Layer w10: v1(3251,4219) 3251.84,4219.84 4263.16,4219.84 4824.74,3658.26 4905.26,3658.26 v1(4906,3659)
NetU1_15: U1.15 U10.12 | length 2095.8
  Top Layer w10: v1(3318,4309) 3331,4309 3383.4,4256.6 U10.12@3383.4,4207.54 ; v1(4944,3632) 4977.53,3632 U1.15@4978.59,3633.1
  Bottom Layer w10: v1(3318,4309) 3319.16,4307.84 4299.16,4307.84 4944,3663 v1(4944,3632)
NetU1_16: U1.16 U10.11 | length 2026.5
  Top Layer w10: v1(3402,4327) 3403.09,4325.91 U10.11@3403.09,4207.54 ; v1(4989,3673) 4994.34,3667.66 U1.16@4994.34,3633.1
  Bottom Layer w10: v1(3402,4327) 3410,4335 4309,4335 4971,3673 v1(4989,3673)
NetU1_18: U1.18 Y1.1 | length 1345.1
  Top Layer w10: Y1.1@3922,3432.04 3922,3463 v1(3923,3464) ; v1(5014,3687) 5025.83,3675.17 U1.18@5025.83,3633.1
  Bottom Layer w10: v1(3923,3464) 4027,3568 4997,3568 5027,3598 5027,3674 v1(5014,3687)
NetU1_28: U1.28 U8.4 | length 1486.6
  Top Layer w10: U8.4@3947.49,3656.16 4001.84,3656.16 4145,3513 v1(4163,3513) ; U1.28@5183.31,3633.1 5184.21,3634 v1(5216,3634)
  Bottom Layer w10: v1(4163,3513) 4209,3467 5113,3467 5216,3570 v1(5216,3634)
NetU1_29: U1.29 U8.1 | length 1712.7
  Top Layer w10: U8.1@3947.49,3597.1 3973.9,3597.1 4098,3473 v1(4098,3464) ; U1.29@5216.19,3665.98 5237.15,3665.98 5286.13,3617 v1(5300,3617)
  Bottom Layer w10: v1(4098,3464) 4170,3392 5199,3392 5300,3493 v1(5300,3617)
NetU1_30: U1.30 U8.2 | length 1661.5
  Top Layer w10: U8.2@3947.49,3616.79 3982.21,3616.79 v1(4120,3479) ; U1.30@5216.19,3681.72 5217.25,3680.66 5242.26,3680.66 5263.92,3659 v1(5279.84,3659)
  Bottom Layer w10: v1(4120,3479) 4183,3416 5160,3416 5280,3536 5280,3658.84 v1(5279.84,3659)
NetU1_31: U1.31 U8.3 | length 1612
  Top Layer w10: U8.3@3947.49,3636.47 3991.53,3636.47 4137,3491 v1(4146,3491) ; U1.31@5216.19,3697.47 5256.53,3697.47 v1(5262,3692)
  Bottom Layer w10: v1(4146,3491) 4196,3441 5121,3441 5262,3582 v1(5262,3692)
NetU1_32: U1.32 U8.30 | length 2058.2
  Top Layer w10: v1(3882.53,3536.53) U8.30@3882.53,3571.51 ; U1.32@5216.19,3713.22 5216.97,3714 5271,3714 v1(5306,3679)
  Bottom Layer w10: v1(3882.53,3536.53) 3882.53,3411.47 3926,3368 5253,3368 5393,3508 5393,3592 v1(5306,3679)
NetU1_34: U1.34 U8.25 | length 2436
  Top Layer w10: v1(3784.1,3537.1) U8.25@3784.1,3571.51 ; U1.34@5216.19,3744.72 5243.05,3744.72 5245.61,3742.16 5263.39,3742.16 5279,3757.77 v1(5279,3779)
  Bottom Layer w10: v1(3784.1,3537.1) 3784.1,3412.9 3879,3318 5341,3318 5461,3438 5461,3603 5285,3779 v1(5279,3779)
NetU1_35: U1.35 U8.26 | length 2252.1
  Top Layer w10: v1(3803.79,3537.21) U8.26@3803.79,3571.51 ; U1.35@5216.19,3760.46 5256.46,3760.46 v1(5257,3761)
  Bottom Layer w10: v1(3803.79,3537.21) 3803.79,3439.21 3899,3344 5293,3344 5428,3479 5428,3596.4 5331.4,3693 5320.53,3693 5257,3756.53 v1(5257,3761)
NetU1_51: U1.51 U2.7 | length 316.2
  Top Layer w10: U2.7@5026.11,4124.05 5090.48,4124.05 5111.74,4102.79 5111.74,4012.24 5057.33,3957.83 U1.51@5057.33,3903.57
NetU1_52: U1.52 U2.6 | length 242.5
  Top Layer w10: U2.6@5026.11,4074.05 5069.61,4074.05 5090.09,4053.57 5090.09,4017.16 5041.58,3968.65 U1.52@5041.58,3903.57
NetU1_53: U1.53 U2.5 | length 120.6
  Top Layer w10: U1.53@5025.83,3903.57 5025.83,4023.77 U2.5@5026.11,4024.05
NetU1_54: U1.54 U2.3 | length 363.6
  Top Layer w10: U2.3@4742.25,4074.05 4882.61,4074.05 5010.09,3946.57 U1.54@5010.09,3903.57
NetU1_55: U1.55 U2.2 | length 519.7
  Top Layer w10: U2.2@4742.25,4124.05 4739.63,4121.42 4702.23,4121.42 4692,4111.2 4692,4017 4721,3988 4945.03,3988 4993.28,3939.76 4993.28,3904.64 U1.55@4994.34,3903.57
NetU8_29: U8.29 Y1.3 | length 74.6
  Top Layer w10: U8.29@3862.84,3571.51 3862.84,3497.1 Y1.3@3862.94,3497
power_in: C16.1 C20.1 C22.1 J1.A4_B9 J1.B4_A9 R12.2 R14.1 TP4.1 U6.1 U6.3 U7.1 U7.3 U12.4 U12.5 U12.6 | length 7513.8
  Top Layer w10: C22.1@3383.5,3610 3383.6,3610.1 U7.1@3383.6,3701.82 3383.6,3733.6 3395,3745 3449,3745 3458.4,3735.6 U7.3@3458.4,3701.82 ; C16.1@4032.64,4304 U12.4@4084,4304 U12.5@4084,4246.13 U12.6@4103.69,4246.13 ; R14.1@5474.6,4070.03 5632.68,4070.03 5637.6,4065.11 v3(5638.95,4065.11) ; U6.3@5475.31,4369.11 5441.95,4369.11 5427.95,4355.11 5427.95,4307.11 5440.76,4294.31 U6.1@5475.31,4294.31 5545.4,4294.31 5545.95,4294.86 5603.86,4294.86 v1(5604,4295) ; v3(5639.95,3876.11) 5607.95,3844.11 R12.2@5607.95,3708.11 5662.89,3708.11 TP4.1@5705,3666 ; J1.A4_B9@5709.07,3876.24 J1.A4_B9@5709.2,3876.36 ; J1.B4_A9@5709.08,4065.22 J1.B4_A9@5709.2,4065.34
  Top Layer w15: v3(5638.95,4065.11) 5639.18,4065.34 J1.B4_A9@5709.2,4065.34 ; v3(5639.95,3876.11) 5640.2,3876.36 J1.A4_B9@5709.2,3876.36
  Top Layer w20: v1(3381,3557) 3381,3607.5 C22.1@3383.5,3610 ; C16.1@4032.64,4304 4033,4304.36 v1(4033,4359)
  Bottom Layer w10: v1(5604,4295) 5637.95,4295 5638.95,4294 ; 5637.95,4130 5638.95,4129
  Bottom Layer w20: v1(3381,3557) v1(3381,3520) 3381,3485 3844,3022 5355,3022 5639.95,3306.95 v3(5639.95,3876.11) 5663,3899.16 5663,4041.06 v3(5638.95,4065.11) 5638.95,4129 5638.95,4294 5638.95,4640.05 5353,4926 4326,4926 4033,4633 v1(4033,4426) v1(4033,4395) v1(4033,4359)
Q_N: C50.2 L5.2 U10.6 | length 888.7
  Top Layer w8.8: U10.6@3471,4139.63 3471.43,4139.2 3489.42,4139.2 3491.31,4137.32 3521.48,4137.32 v1(3522,4137.84) ; L5.2@3990.59,4126 4005.94,4141.35 C50.2@4036,4141.35 4041.16,4146.51 4041.16,4155.94 4046.31,4161.1 4056.64,4161.1 4056.82,4161.28 4081.82,4161.28 v1(4082,4161.1) v1@4082.23,4161.33
  Bottom Layer w8.8: v1(3522,4137.84) 3521.77,4137.61 3503.7,4137.61 3489.2,4123.11 3489.2,4080.04 3508.24,4061 3901,4061 4001.62,4161.62 4056.76,4161.62 4056.84,4161.54 4080.71,4161.54 4081.15,4161.1 v1(4082,4161.1)
Q_O_N: L5.1 U9.15 | length 73.1
  Top Layer w8.8: U9.15@3877.61,4159.39 3877.81,4159.19 3906.18,4159.19 3933.41,4131.95 L5.1@3933.41,4126
Q_O_P: L3.1 U9.16 | length 73.3
  Top Layer w8.8: U9.16@3877.61,4179.07 3877.81,4179.27 3905.63,4179.27 3933.41,4207.05 L3.1@3933.41,4213
Q_P: C49.2 L3.2 U10.5 | length 830
  Top Layer w8.8: U10.5@3471,4119.94 3471.43,4120.37 3489.42,4120.37 3489.57,4120.52 3520.63,4120.52 3521.15,4120 v1(3522,4120) ; L3.2@3990.59,4213 4005.94,4197.65 C49.2@4036,4197.65 4041.16,4192.49 4041.16,4183.06 4046.31,4177.9 4049.68,4177.9 4049.86,4178.08 4074.59,4178.08 4075.23,4178.71 4081.77,4178.71 v1(4082,4178.94)
  Bottom Layer w8.8: v1(3522,4120) 3513,4120 3506,4113 3506,4087 3515.2,4077.8 3894.04,4077.8 3994.66,4178.42 4063.72,4178.42 4063.8,4178.34 4081.4,4178.34 v1(4082,4178.94)
res_out_N: B2.4 U9.21 | length 58.4
  Top Layer w10: U9.21@3810.69,4258.64 U9.21@3810.69,4246 ; U9.21@3810.76,4246.08 U9.21@3810.69,4246 ; B2.4@3813.8,4290.31 3813.8,4288.5 3810.69,4285.39 U9.21@3810.69,4246
res_out_P: B2.3 U9.22 | length 45.5
  Top Layer w10: B2.3@3788.2,4290.31 3788.2,4288.5 3791,4285.71 U9.22@3791,4246
rf_ref_N: C27.2 U9.9 | length 152.7
  Top Layer w8.8: C27.2@3767,3972.53 3778.35,3983.88 3787.53,3983.88 3792.68,3989.03 3792.68,4039.28 3792.44,4039.52 3792.44,4077.94 3791,4079.38 U9.9@3791,4092.46 ; C27.2@3768,3972.12 C27.2@3779.35,3983.47
rf_ref_P: C26.2 U9.10 | length 136.9
  Top Layer w8.8: U9.10@3810.69,4092.46 3810.69,4079.38 3809.24,4077.94 3809.24,4046.48 3809.48,4046.24 3809.48,3988.62 3814.64,3983.47 3823.65,3983.47 C26.2@3835,3972.12
rfoutA_N: C25.1 U8.13 | length 193.3
  Top Layer w8.8: U8.13@3843.16,3760.49 3843.16,3771.6 3844.6,3773.04 3844.6,3870.02 3868.48,3893.9 3885.97,3893.9 3891.12,3899.05 3891.12,3907.65 C25.1@3902.47,3919
rfoutA_P: C24.1 U8.12 | length 165.5
  Top Layer w8.8: U8.12@3862.84,3760.49 3862.84,3771.6 3861.4,3773.04 3861.4,3863.06 3875.44,3877.1 3885.97,3877.1 3891.12,3871.95 3891.12,3863.35 C24.1@3902.47,3852
rfoutB_N: C27.1 U8.15 | length 174.7
  Top Layer w8.8: C27.1@3767,3913.47 3778.35,3902.12 3787.36,3902.12 3792.52,3896.97 3792.52,3839.1 3805.23,3826.39 3805.23,3773.04 3803.79,3771.6 U8.15@3803.79,3760.49
rfoutB_P: C26.1 U8.14 | length 174.5
  Top Layer w8.8: U8.14@3823.47,3760.49 3823.47,3771.6 3822.03,3773.04 3822.03,3833.35 3809.32,3846.06 3809.32,3896.56 3814.47,3901.71 3823.65,3901.71 C26.1@3835,3913.06
rset: R19.2 U8.22 | length 88.4
  Top Layer w10: R19.2@3678.59,3657 3683.13,3652.46 3699.54,3652.46 3715.53,3636.47 U8.22@3758.51,3636.47
run: R10.1 S2.3 S2.4 U1.26 | length 932.3
  Top Layer w10: S2.4@4859.73,3227 S2.3@5218,3227 5218.64,3227.64 R10.1@5218.64,3324 5282.14,3324 5288,3329.86 5288,3543 5235,3596 5157.68,3596 5151.82,3601.86 U1.26@5151.82,3633.1
SCL: R8.1 TP1.1 U1.3 U3.B2 U4.7 U11.8 | length 3986.5
  Top Layer w10: U11.8@3290.21,4798 v1(3329,4798) ; U3.B2@3325.37,4672.31 3448.32,4672.31 3514,4738 v1(3514,4740) 3518,4736 TP1.1@4385,4736 ; TP1.1@4385,4739 4427,4739 v1(4429,4741) 4468,4741 4591,4618 4591,3946 4591,3896.09 4711.09,3776 4754,3776 4819,3776 4882.2,3839.2 U1.3@4945.72,3839.2 ; U4.7@5434.95,4223.29 v1(5435,4253) v1(5435,4253)
  Bottom Layer w10: v1(3329,4798) 3387,4740 v1(3514,4740) ; v1(4429,4741) 4592.69,4741 5064.84,4268.84 5419.16,4268.84 v1(5435,4253)
SDA: R9.1 TP3.1 U1.2 U3.A2 U4.8 U11.7 | length 3619.6
  Top Layer w10: U11.7@3290.21,4778.31 3433,4778.31 ; U3.A2@3325.37,4692 3413,4692 3433,4712 3433,4778.31 ; U1.2@4945.72,3854.95 4944.65,3856.02 4930.05,3856.02 4929.73,3856.33 4879.33,3856.33 4842.41,3819.41 R9.1@4753,3819.41 4752.64,3819.77 4728.11,3819.77 4624,3923.88 4624,4629 4474.69,4778.31 4070,4778.31 4021,4778.31 3433,4778.31 ; v1(5386,4251) 5399.21,4251 5419.2,4231.01 U4.8@5419.2,4223.29
  Bottom Layer w10: v1(4624,4600) 4973,4251 v1(5386,4251)
swclk: J5.1 U1.24 | length 1020.7
  Top Layer w10: J5.1@4679,3138 4679,3436 4766,3523 v1(4769,3523) ; U1.24@5121.39,3634.17 U1.24@5120.32,3633.1 5120.32,3664.64 5154.69,3699 v1(5170,3699)
  Bottom Layer w10: v1(4769,3523) 5038,3523 5105.3,3590.3 5105.3,3634.3 v1(5170,3699)
swdio: J5.3 U1.25 | length 1202.2
  Top Layer w10: J5.3@4468,3152 4468,3427.14 4500.43,3459.57 4505.57,3459.57 v1(4538,3492) ; U1.25@5136.07,3633.1 5137.13,3634.17 5137.13,3651.04 5161.09,3675 v1(5175,3675)
  Bottom Layer w10: v1(4538,3492) 5071,3492 5181,3602 5181,3669 v1(5175,3675)
temp: C37.1 C38.2 U8.19 | length 143.3
  Top Layer w10: C37.1@3624.53,3718 3626.61,3715.92 C38.2@3679,3715.92 3708.08,3715.92 3728.47,3695.53 U8.19@3758.51,3695.53
temp_int: U1.4 U3.C2 | length 2252.8
  Top Layer w10: U3.C2@3325.37,4652.63 3551.63,4652.63 3613,4714 4219,4714 4357,4576 v1(4558,4576) ; v1(4909,3821.36) 4911.09,3823.46 U1.4@4945.72,3823.46
  Bottom Layer w10: v1(4558,4576) 4779,4355 4779,3976 4909,3846 v1(4909,3821.36)
USB_N: R5.1 U1.47 | length 356.5
  Top Layer w11: U1.47@5120.01,3918.51 5120.01,3942.71 5157.38,3980.08 5422.61,3980.08 5431.96,3989.43 R5.1@5432.94,3989.43
USB_P: R4.1 U1.46 | length 329.1
  Top Layer w11: U1.46@5136.95,3918.51 5136.95,3935.7 5164.4,3963.14 5420.85,3963.14 5431.96,3952.03 R4.1@5432.94,3952.03
vcom: C41.1 C42.2 U8.23 | length 142.6
  Top Layer w10: C41.1@3624.53,3596 3624.61,3596.08 C42.2@3679,3596.08 3679.24,3596.32 3702.32,3596.32 3722.79,3616.79 U8.23@3758.51,3616.79
vref: C39.1 C40.2 U8.24 | length 196.3
  Top Layer w10: C40.2@3681.17,3485.91 C40.2@3672,3495.08 3731.92,3495.08 C39.1@3732,3495 3732,3588 3741.1,3597.1 U8.24@3758.51,3597.1
vtune: C36.1 R18.2 U8.20 | length 624.9
  Top Layer w10: v1(3721,3676) 3721.16,3675.84 U8.20@3758.51,3675.84 ; v1(4094,3620) 4105.76,3608.24 4105.76,3583.09 4111.62,3577.24 4195.22,3577.24 C36.1@4195.45,3577
  Bottom Layer w10: v1(3721,3676) 3790,3745 3934,3745 4059,3620 v1(4094,3620)
pads on no net: B1.6 B2.2 B2.5 B2.6 J1.A8 J1.B8 U1.9 U1.14 U1.17 U1.27 U1.37 U1.38 U1.39 U5.4 U6.4 U7.4 U8.5 U9.12 U10.9 U10.10 U11.2 U11.3 U11.9 U11.13

## Polygon pours and split planes (outlines as drawn)
GND on Bottom Layer "GND_L04_P001" (solid, pour order 1): 3079.66,4980.56 5903.44,4980.56 5948,4936 5948,2981 3105,2981 3072,3014
GND on Top Layer "GND_L01_P002" (solid, pour order 2): 3080,4980 5903,4980 5948,4935 5948,2981 3105,2981 3072,3014
+3V3 on VDD (split plane): 281 vertices, not listed, extent 1020.1,2976.1 5972.9,4979.9
GND on GND (split plane): 281 vertices, not listed, extent 1020.1,2976.1 5972.9,4979.9

## Silkscreen, mask and mechanical layers (free items; w line width, h text height)
Top Overlay:
  text "FYDP 1.0" at 5523,4893 h40
  text "SDA" at 4011,4818 h40
  text "EJK" at 5523,4809 h40
  text "SCL" at 4335,4778 h40
  text "UART" at 4860,4672 h40
  text "gnd" at 3225,4528.33 h40
  text "+Boost" at 4032,4483 h40
  text "gnd" at 4315,4480.33 h40
  text "+5" at 3409,4464 h40
  text "+3D" at 4962,4416 h40
  text "gnd" at 4690,4239.33 h40
  text "gnd" at 3102,3889.33 h40
  text "gnd" at 4613,3592.33 h40
  text "+V" at 5694,3588 h40
  text "gnd" at 3451,3439.33 h40
  text "dbg" at 4518,3282.33 h40
  text "Run" at 4971,3274 h40
  text "Boot" at 5545,3272 h40
Top Solder:
  rectangle: 1045,2984 3020,4958
  rectangle: 3086,4760 3148,4790
  rectangle: 3188,4767 3289,4888
  rectangle: 3275,4644 3337,4705
  rectangle: 3603,4282 3680,4319
  rectangle: 3690,4281 3771,4319
  rectangle: 3781,4281 3821,4339
  rectangle: 3743,3596 3964,3741
  rectangle: 3776,3557 3929,3775
  rectangle: 3338,4113 3382,4189
  rectangle: 3375,4076 3450,4114
  rectangle: 3450,4113 3488,4186
  rectangle: 3375,4186 3450,4224
  rectangle: 3843,4115 3898,4224
  rectangle: 3746,4075 3856,4115
  rectangle: 3704,4114 3746,4224
  rectangle: 3746,4224 3856,4267
  rectangle: 3996,3866 4053,3879
  rectangle: 4013,3891 4039,3905
Mechanical 1:
  lines w1.97: 1000,3006 ccw(c1050,3006) 1050,2956 5943,2956 ccw(c5943,3006) 5993,3006 5993,4950 ccw(c5943,4950) 5943,5000 1050,5000 ccw(c1050,4950) 1000,4950 1000,4922 1000,3006

## Text inside footprints (layer, text, board x,y; h text height)
J1: Mechanical 13 "PCB EDGE" at 5990.69,4226.76 h40 r90